# EAGLE board cheap_load_share (EAGLE 9.4.0)

Size 136.69 x 80 mm. Coordinates in mm from the lower left corner, seen from the top.
Outline: 36.69,0 136.69,0 136.69,80 36.69,80 36.69,0
Copper layers (1*16): Top 0.035mm / dielectric 1.5mm / Bottom 0.035mm
Design rules "default": minimum track width 6mil, minimum drill 0.35mm, track to track 6mil, track to pad 6mil, pad to pad 6mil, via to via 6mil, smd to smd 6mil, copper to edge 40mil, drill to drill 6mil, minimum pad ring 10mil, minimum via ring 8mil, stop-mask expansion 4mil, vias tented up to drill 0mil, thermal gap 10mil

## Footprints (pad centres in the part's own frame; a part is rotated, then mirrored left to right if it is on the bottom)
C0402K = smd 0.925 x 0.74: 1 -0.6,0; 2 0.6,0
C0805 = smd 1.3 x 1.5: 1 -0.95,0; 2 0.95,0
USB-MINIB = smd 0.5 x 2.308: D+ 0,4.064; D- -0.8,4.064; GND 1.6,4.064; ID 0.8,4.064; VBUS -1.6,4.064 | smd 2 x 2.4: GND1 -4.4,-2; GND2 -4.4,3.5; GND3 4.4,3.5; GND4 4.4,-2 | hole 1: -2.2,1; 2.2,1
SOD-123 = smd 1.2 x 0.7: A 1.85,0; C -1.85,0
1X02 = drill 1.016 pad 1.88: 1 0,0; 2 2.54,0
1X01_OFFSET = drill 1.118 pad 1.88 offset: 1 0,0
SML0603 = smd 0.8 x 0.8: A 0.75,0; C -0.75,0
SOT23-3 = smd 0.8 x 0.9: 1 -0.95,-1; 2 0.95,-1; 3 0,1.1
R0402 = smd 0.7 x 0.9: 1 -0.65,0; 2 0.65,0
SOT23-5 = smd 0.55 x 1.2: 1 -0.95,-1.3; 2 0,-1.3; 3 0.95,-1.3; 4 0.95,1.3; 5 -0.95,1.3
XDFN8 = smd 0.26 x 0.55: 1 0.2,0.1; 2 0.6,0.1; 3 1,0.1; 4 1.4,0.1; 5 1.4,1.103; 6 1,1.103; 7 0.6,1.103; 8 0.2,1.103 | smd 1.2 x 0.3: PAD 0.8,0.6

## Placement (x,y rotation side)
C1  1uF  [C0402K]  -0.14,24.13 0 top
C2  4.7uF  [C0402K]  3.67,24.13 0 top
C3  4.7uF  [C0805]  1.13,16.51 0 top
CN1  [USB-MINIB]  40.5,6.35 270 top
D1  B130LAW  [SOD-123]  4.94,29.21 0 top
J1  3.7_LIPO  [1X02]  7.48,16.51 0 top
J2  [1X01_OFFSET]  -3.95,2.54 0 top  (outside the outline)
J3  [1X01_OFFSET]  -9.03,2.54 0 top  (outside the outline)
LED3  [SML0603]  18.91,27.94 0 top
Q1  DMP1045U  [SOT23-3]  10.02,24.13 0 top
R1  [R0402]  10.02,27.94 0 top
R2  100K  [R0402]  18.91,24.13 0 top
R16  [R0402]  13.83,27.94 0 top
U2  MCP73831  [SOT23-5]  15.1,24.13 0 top
U$4  NCP186-AMX  [XDFN8]  -0.14,27.94 0 top

## Library data of the parts
C1-C3 R1 R2 R16 = resistor
CN1 D1 = adafruit
J1-J3 = SparkFun-Connectors
LED3 = led
Q1 = SparkFun-DiscreteSemi; PROD_ID: TRANS-08285
U2 = SparkFun-PowerIC; PROD_ID: IC-09995
U$4 = Ladvien_Eagle_Parts

## Nets
5V: C2.1 CN1.VBUS D1.A Q1.1 R2.2 R16.2 U2.4
GND: C1.2 C2.2 C3.2 CN1.GND CN1.GND1 CN1.GND2 CN1.GND3 CN1.GND4 J1.2 J3.1 R1.1 R2.1 U2.2 U$4.5 U$4.PAD
N$1: LED3.A R16.1
N$2: LED3.C U2.1
N$20: R1.2 U2.5
V+: C1.1 D1.C J2.1 Q1.2 U$4.6 U$4.7 U$4.8
V_BATT: C3.1 J1.1 Q1.3 U2.3
VCC: U$4.1 U$4.2 U$4.4

## Tracks (layer width: path | path; a pad name or v marks a point on that pad's centre or on a via)
5V  (6 unrouted)
GND  (14 unrouted)
N$1  (1 unrouted)
N$2  (1 unrouted)
N$20  (1 unrouted)
V+  (6 unrouted)
V_BATT  (3 unrouted)
VCC  (2 unrouted)